# Altium PCB DigitalClocks.PcbDoc
Units mm, origin at the board's own origin, x right, y up, seen from the top; angles counter-clockwise.
Board outline 140 x 100 mm, 2 copper layers (Top Layer, Bottom Layer); 30 components, 81 nets, 289 pads, 15 vias.
Unrouted connection lines stored in the file: 31.
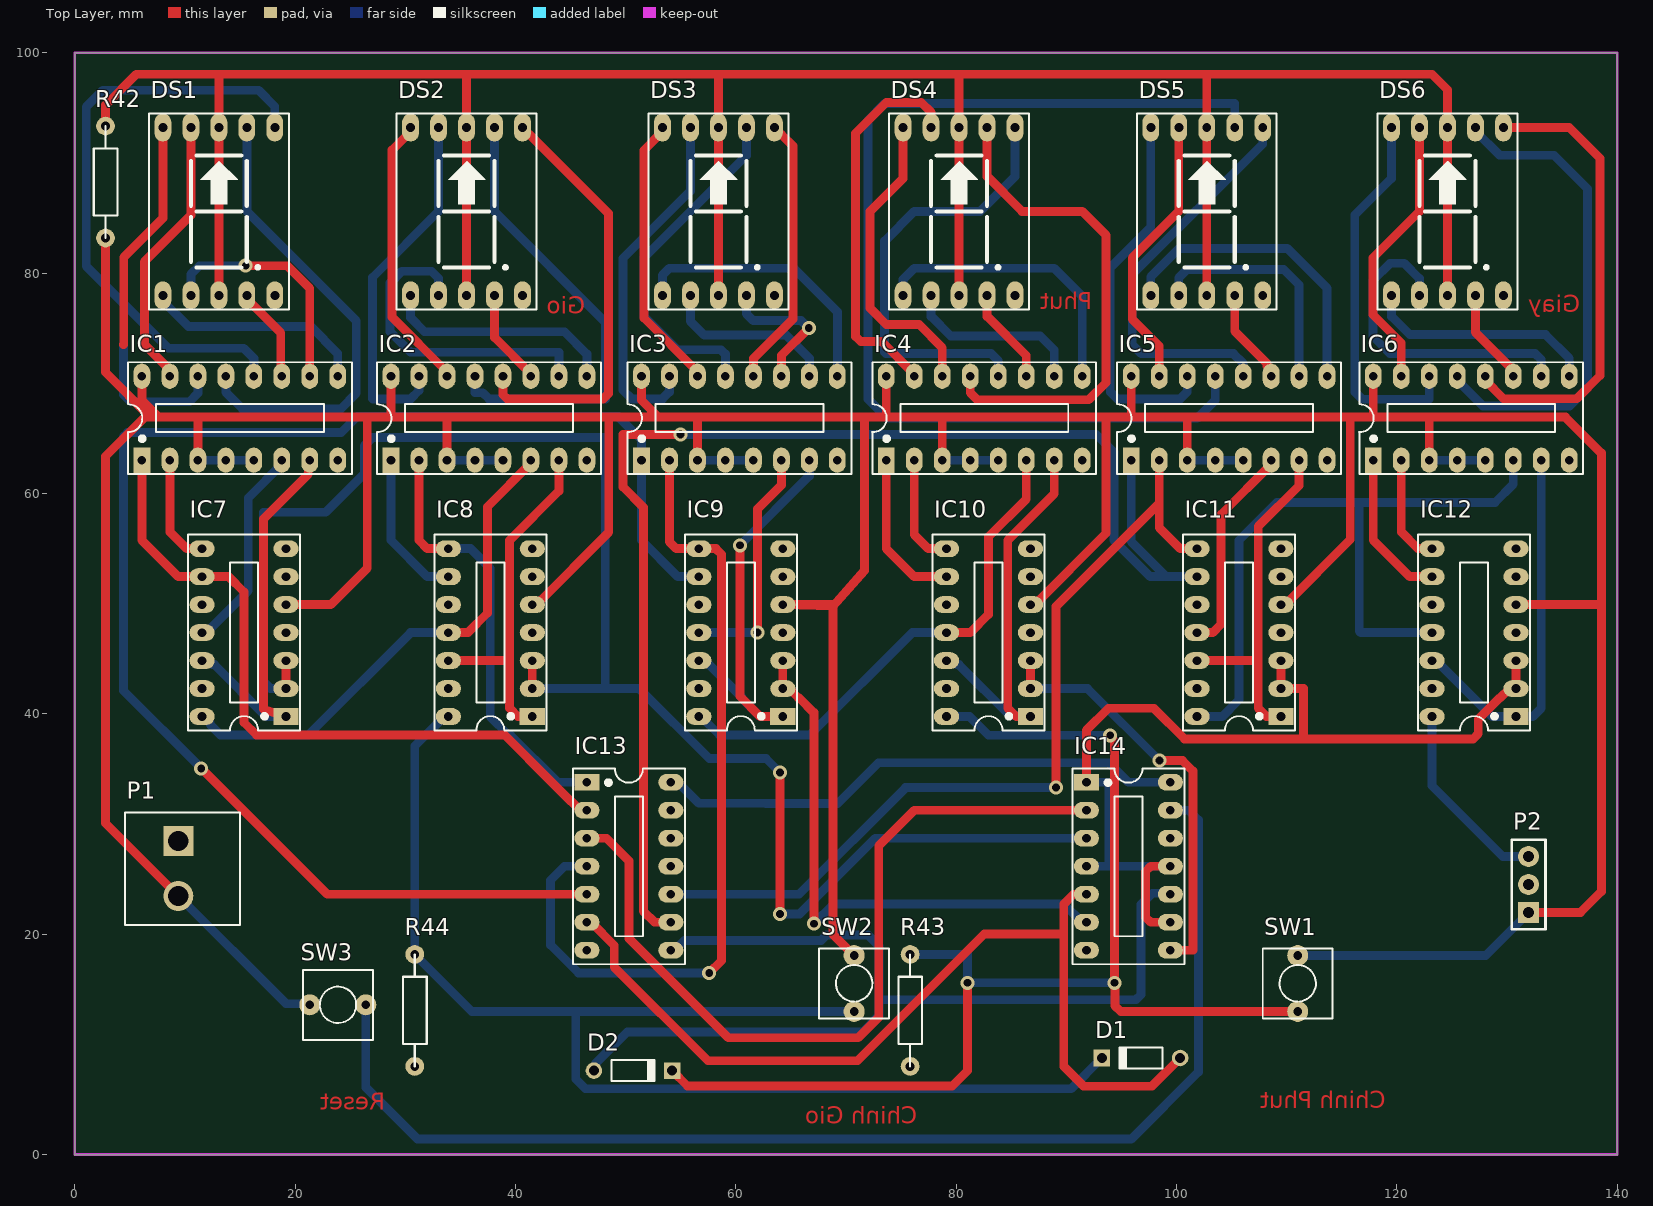
[diagram p0: Top Layer view]
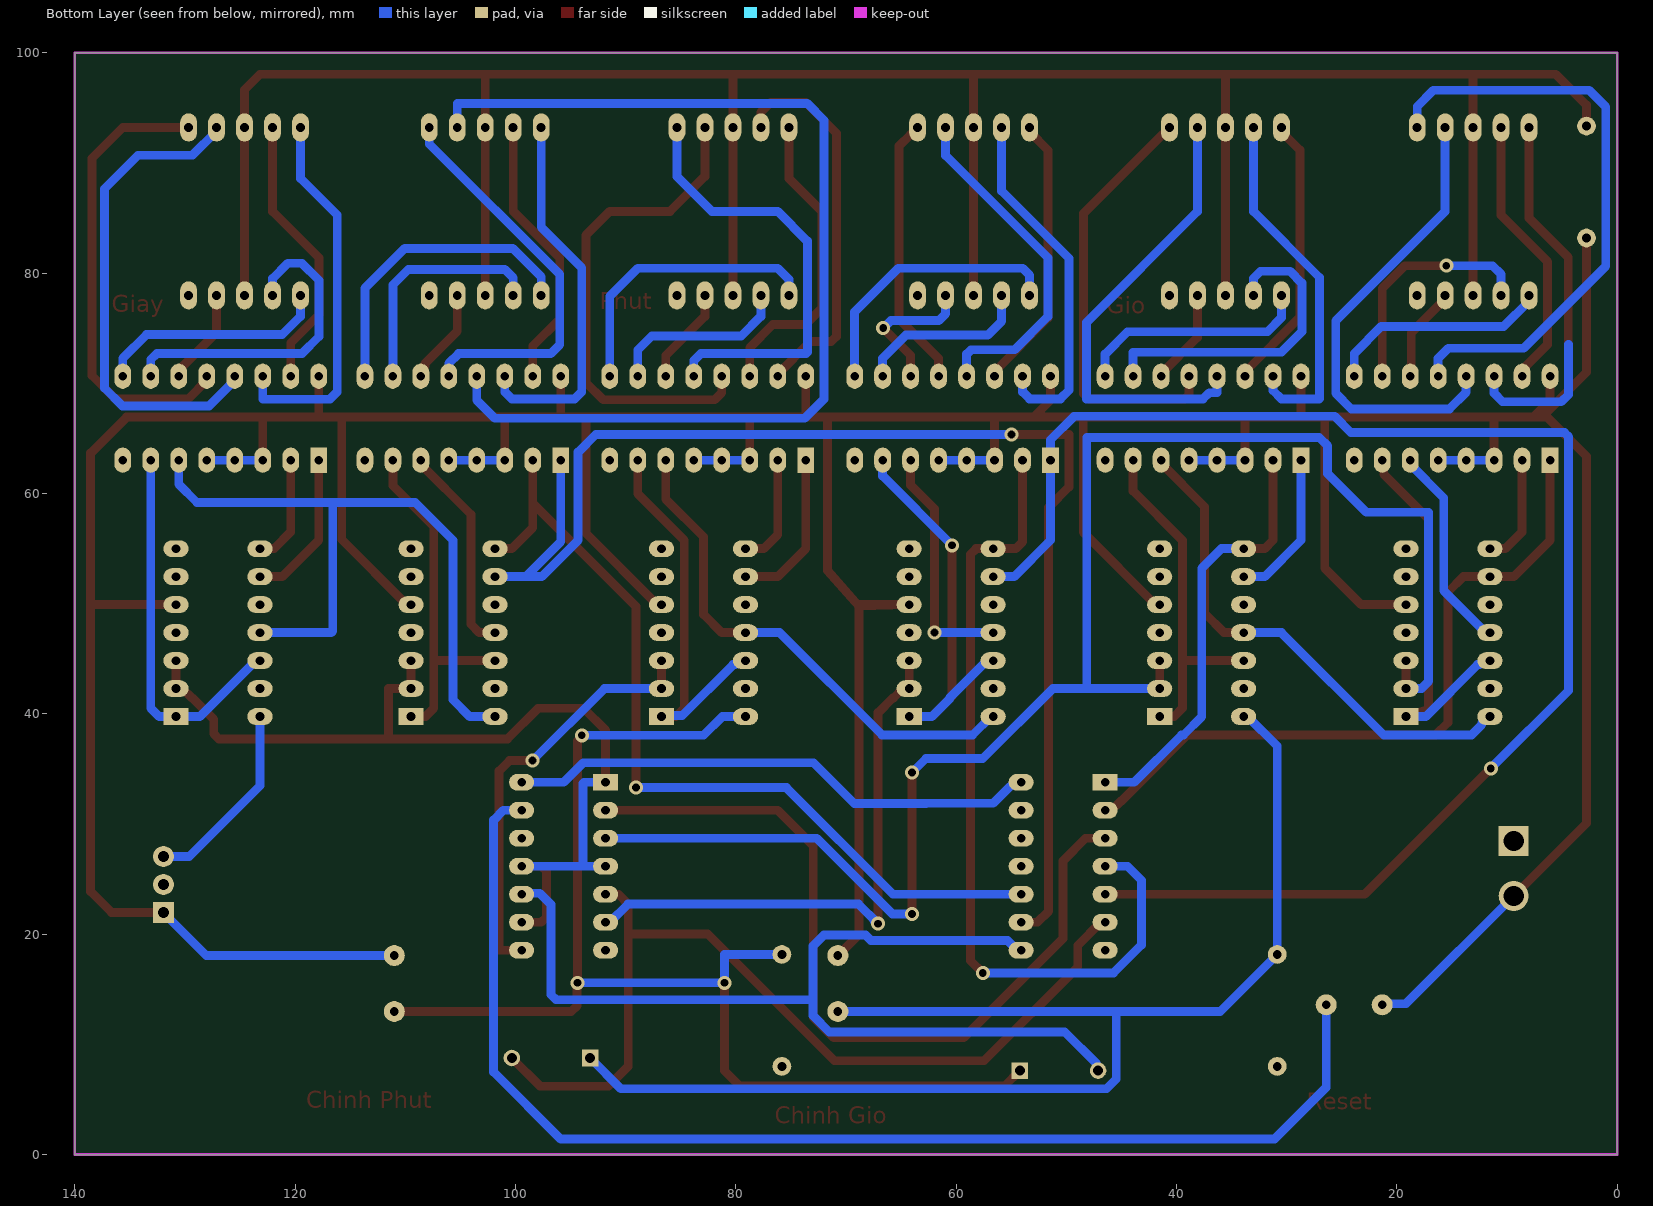
[diagram p1: Bottom Layer view, seen from below]
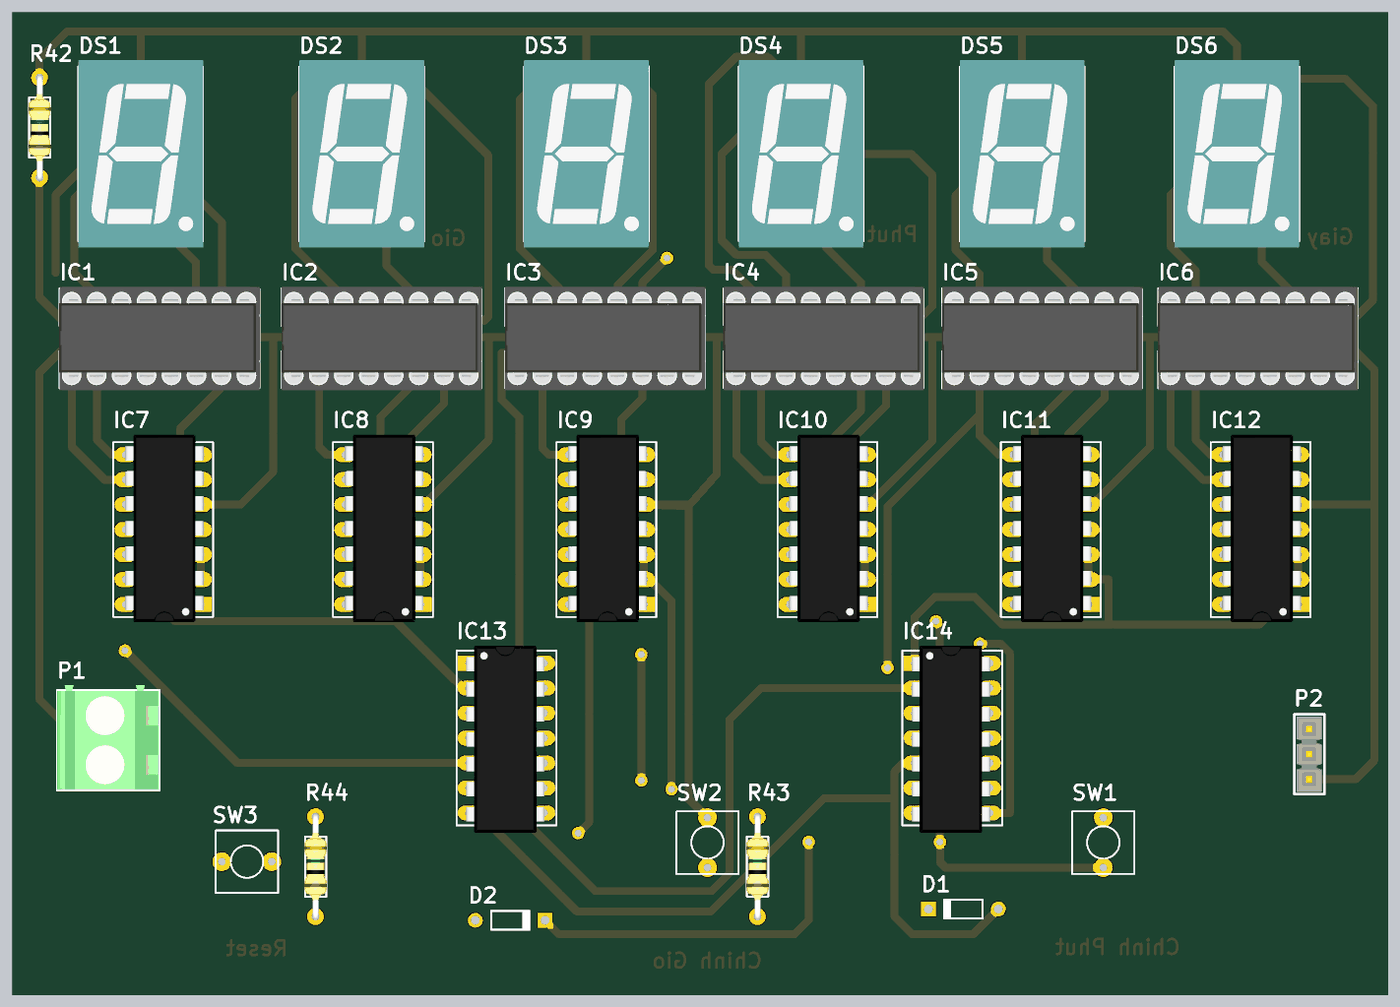
[diagram p2: 3D render of the assembled board from above, using the file's embedded part models]

## Layer stack, top to bottom
Top Solder: solder mask 0.0102, Solder Resist, Dk 3.5
Top Layer: signal copper 0.0356
Dielectric 1: dielectric 0.32, FR-4, Dk 4.8
Bottom Layer: signal copper 0.0356
Bottom Solder: solder mask 0.0102, Solder Resist, Dk 3.5

## Board outline
0,0 0,100 140,100 140,0

## Design rules (kind name [scope] priority, off if disabled: settings)
Clearance [All] p1: gap=0.5 ignorepadtopadclearanceinfootprint=FALSE
PolygonConnect [All] p1: connectstyle=Relief reliefconductorwidth=0.254 reliefentries=4 polygonreliefangle="90 Angle" airgapwidth=0.254
RoutingVias [All] p1: holewidth=0.711 width=1.27 viastyle="Through Hole" minholewidth=0.711 minwidth=1.27 maxholewidth=0.711 maxwidth=1.27
SolderMaskExpansion [All] p1: expansion=0.102 istentingtop=FALSE
Width [All] p1: maxlimit=0.8 minlimit=0.6 preferedwidth=0.8
30 further rules are at their usual default settings.

## Components (designator, comment, footprint, x,y, rotation, side; value= is the part's Value field where it differs from the comment)
D1 "Diode 1N4148" DO-35 96.774,8.763 r180 top
D2 "Diode 1N4148" DO-35 50.673,7.62 r0 top
DS1 "7SEG S" 7SEGS 8.001,77.978 r0 top value="LED 7S SEG"
DS2 "7SEG S" 7SEGS 30.48,77.978 r0 top value="LED 7S SEG"
DS3 "7SEG S" 7SEGS 53.34,77.978 r0 top value="LED 7S SEG"
DS4 "7SEG S" 7SEGS 75.184,77.978 r0 top value="LED 7S SEG"
DS5 "7SEG S" 7SEGS 97.663,77.978 r0 top value="LED 7S SEG"
DS6 "7SEG S" 7SEGS 119.507,77.978 r0 top value="LED 7S SEG"
IC1 "7447" DIP16/W0.3 6.096,63.019 r0 top value="7447 , 74247"
IC2 "7447" DIP16/W0.3 28.702,63.019 r0 top value="7447 , 74247"
IC3 "7447" DIP16/W0.3 51.435,63.019 r0 top value="7447 , 74247"
IC4 "7447" DIP16/W0.3 73.66,63.019 r0 top value="7447 , 74247"
IC5 "7447" DIP16/W0.3 95.885,63.019 r0 top value="7447 , 74247"
IC6 "7447" DIP16/W0.3 117.856,63.019 r0 top value="7447 , 74247"
IC7 "7490" DIP14/W0.3 19.177,39.751 r90 top
IC8 "7490" DIP14/W0.3 41.529,39.751 r90 top
IC9 "7490" DIP14/W0.3 64.262,39.751 r90 top
IC10 "7490" DIP14/W0.3 86.741,39.751 r90 top
IC11 "7490" DIP14/W0.3 109.474,39.751 r90 top
IC12 "7490" DIP14/W0.3 130.81,39.751 r90 top
IC13 "7408" DIP14/W0.3 46.482,33.782 r270 top
IC14 "7432" DIP14/W0.3 91.821,33.782 r270 top
P1 "Header 2" "TBlock 2" 9.398,28.448 r270 top
P2 "Header 3" "Header 3" 131.953,21.971 r90 top
R42 "RESISTOR" "Res 10mm (1/2W)" 2.794,88.265 r90 top value=470
R43 "RESISTOR" "Res 10mm (1/2W)" 75.819,13.081 r90 top value=330
R44 "RESISTOR" "Res 10mm (1/2W)" 30.861,13.081 r90 top value=330
SW1 "SW" SW2 110.998,18.059 r270 top value="SW chip 2 pin"
SW2 "SW" SW2 70.739,18.059 r270 top value="SW chip 2 pin"
SW3 "SW" SW2 26.416,13.589 r180 top value="SW chip 2 pin"

## Footprints (in the part's own frame and the unit in brackets; to place one, negate y for a bottom-side part, rotate by r counter-clockwise, add the part's x,y. Pads: shape width x height; smd on the part's side, far side on the other; paste and mask are expansions set on the pad)
7SEGS [mil] "DIP 10 Leads; Body 12 x 15 mm; Pitch 0.5 mm"
  oval 60x100 hole 32: 1(0,0) 2(100,0) 3(200,0) 4(300,0) 5(400,0) 6(400,600) 7(300,600) 8(200,600) 9(100,600) 10(0,600)
  silkscreen extent -50,-50 450,650, body extent -50,-75 450,675, height 316
DIP14/W0.3 [mil] "14PINs, W=300mil, Pitch=100mil"
  rect 60x90 hole 31: 1(0,0)
  oval 60x90 hole 31: 2(100,0) 3(200,0) 4(300,0) 5(400,0) 6(500,0) 7(600,0) 8(600,300) 9(500,300) 10(400,300) 11(300,300) 12(200,300) 13(100,300) 14(0,300)
  silkscreen extent -50,-50 650,350, body extent -70,-12 680,302, height 145
DIP16/W0.3 [mil] "16 PIN, W=300mil, Pitch=100mil"
  rect 60x90 hole 31: 1(0,0)
  oval 60x90 hole 31: 2(100,0) 3(200,0) 4(300,0) 5(400,0) 6(500,0) 7(600,0) 8(700,0) 9(700,300) 10(600,300) 11(500,300) 12(400,300) 13(300,300) 14(200,300) 15(100,300) 16(0,300)
  silkscreen extent -50,-50 750,350, body extent -52,-57 752,356, height 299
DO-35 [mm] "Diode, Axial; Body 3.8 x 1.9 mm (LxDia. max), Lead Dia. 0.53 mm (max)"
  round 1.5 hole 0.9: 1(-3.55,0)
  rect 1.5x1.5 hole 0.9: 2(3.55,0)
  silkscreen extent -1.95,-0.95 2.05,0.95
"Header 3" [mil] "Connector; Header; 3 Position; Solder Pad 35mil"
  rect 75x75 hole 40: 1(0,0)
  round 75 hole 40: 2(100,0) 3(200,0)
  silkscreen extent -60,-60 260,60, body extent -50,-50 250,50, height 83
"Res 10mm (1/2W)" [mil] "Resistor; 2 Leads; 1/2W; Solder Pad 35mil"
  round 67 hole 32: 1(-200,0) 2(200,0)
  silkscreen extent -200,-43 200,42, body extent -212,-46 212,45, height 96
SW2 [mil] "SW button 2pin, 250x 250 mil"
  round 75 hole 31: 1(0,0) 2(200,0)
  silkscreen extent -25,-125 225,125
"TBlock 2" [mil] "Connector; Terminal; 2 Positions; Solder Pad 35mil"
  rect 107x107 hole 72: 1(0,0)
  round 107 hole 72: 2(196,0)
  silkscreen extent -102,-190 300,220, body extent -122,-189 296,217, height 560

## Part data
D1 D2: "High Conductance Fast Diode", Code_JEDEC=DO-204-AH, ComponentLink1Description="Manufacturer Link", ComponentLink1URL=http://www.fairchildsemi.com/, ComponentLink2Description=Datasheet, ComponentLink2URL=http://www.fairchildsemi.com/ds/1N%2F1N4148.pdf, DatasheetVersion=1997, LatestRevisionDate=17-Jul-2002, LatestRevisionNote="Re-released for DXP Platform.", PackageDescription="Diode, Axial; Body 3.8 x 1.9 mm (LxDia. max), Lead Dia. 0.53 mm (max)", PackageReference=DO-35, Published=8-Jun-2000, Publisher="Altium Limited"
DS1 DS2 DS3 DS4 DS5 DS6: library part LED7S, "Single 7 Seg Dipslay"
IC1 IC2 IC3 IC4 IC5 IC6: "BCD to 7-Segment Decoder/Driver"
IC7 IC8 IC9 IC10 IC11 IC12: "4-Bit Decade Counter"
IC13: "Quad 2-Input AND Gate"
IC14: "Quad 2-Input OR Gate"
P1: "Header, 2-Pin", LatestRevisionDate=17-Jul-2002, LatestRevisionNote="Re-released for DXP Platform.", Publisher="Altium Limited"
P2: "Header, 3-Pin", LatestRevisionDate=17-Jul-2002, LatestRevisionNote="Re-released for DXP Platform.", Publisher="Altium Limited"
R42 R43 R44: "Resistor", LatestRevisionDate=17-Jul-2002, LatestRevisionNote="Re-released for DXP Platform.", PackageReference=AXIAL-0.3, Published=8-Jun-2000, Publisher="Altium Limited"
SW1 SW2 SW3: library part SW2, "Switch button 2 pin"

## Via types
v1: diameter 1.27, hole 0.711, Top Layer to Bottom Layer, 15 vias

## Nets (pads, with @x,y where several pads share a name; then routed paths per layer and width w, separated by ;. In a path a pad name is that pad's centre, name@x,y a point inside that pad or via, vN(x,y) a via of type N, cw(c..) or ccw(c..) an arc to the next point about the centre after c; other vN are vias at no path point)
1-8B: IC2.2 IC8.8 IC13.1 | length 39.5
  Top Layer w0.8: IC2.2 31.242,55.753 32.004,54.991 IC8.8
  Bottom Layer w0.8: IC8.8 35.941,54.991 37.719,53.213 37.719,39.726 39.37,38.075 39.541,38.075 43.833,33.782 IC13.1
1-12A: IC1.7 IC7.1 IC7.12 | length 36.2
  Top Layer w0.8: IC7.1 17.12,40.411 17.12,57.671 21.197,61.749 21.197,62.88 IC1.7
  Bottom Layer w0.8: IC7.12 12.134,44.831 12.496,44.469 12.681,44.469 17.399,39.751 IC7.1
1-12B: IC2.7 IC8.1 IC8.12 | length 32.3
  Top Layer w0.8: IC8.12 39.472,44.831 ; IC8.1 40.234,39.751 39.472,40.513 39.472,44.831 ; IC2.7 43.942,60.223 39.472,55.753 39.472,44.831
1-12C: IC3.7 IC9.1 IC9.12 | length 38.4
  Top Layer w0.8: v1(60.376,55.296) 60.376,41.605 62.23,39.751 IC9.1
  Bottom Layer w0.8: IC9.12 57.219,44.831 57.581,44.469 57.594,44.469 60.554,41.509 60.554,41.427 62.23,39.751 IC9.1 ; v1(60.376,55.296) 66.675,61.595 IC3.7
1-12D: IC4.7 IC10.1 IC10.12 | length 36.3
  Top Layer w0.8: IC10.1 85.446,39.751 84.684,40.513 84.684,55.753 88.9,59.969 IC4.7
  Bottom Layer w0.8: IC10.12 79.698,44.831 80.06,44.469 80.245,44.469 84.867,39.847 86.645,39.847 IC10.1
1-12E: IC5.7 IC11.1 IC11.12 | length 32
  Top Layer w0.8: IC11.12 107.417,44.831 ; IC11.1 108.179,39.751 107.417,40.513 107.417,44.831 ; IC5.7 111.125,60.721 107.417,57.013 107.417,44.831
1-12F: IC6.7 IC12.1 IC12.12 | length 34.8
  Bottom Layer w0.8: IC12.12 123.571,44.831 128.651,39.751 IC12.1 132.334,39.751 133.096,40.513 IC6.7
2-9A: IC1.1 IC7.9 IC13.2 | length 64.7
  Top Layer w0.8: IC1.1 6.096,55.753 9.398,52.451 IC7.9 13.97,52.451 15.367,51.054 15.367,39.218 16.51,38.075 39.014,38.075 43.307,33.782 43.307,33.779 45.005,32.082 45.066,32.082 45.905,31.242 IC13.2
8C-4: IC3.2 IC9.8 IC13.4 | length 76.2
  Top Layer w0.8: IC3.2 53.975,55.626 54.61,54.991 IC9.8 58.191,54.991 58.699,54.483 58.699,17.602 v1(57.582,16.485)
  Bottom Layer w0.8: IC13.4 44.45,26.162 43.18,24.892 43.18,19.025 45.72,16.485 v1(57.582,16.485)
8E-10: IC5.2 IC11.8 IC13.10 | length 79
  Top Layer w0.8: v1(89.052,33.299) 89.052,49.733 98.425,59.106 ; IC5.2 98.425,59.106 ; IC11.8 100.33,54.991 98.425,56.896 98.425,59.106
  Bottom Layer w0.8: IC13.10 65.735,23.622 75.413,33.299 v1(89.052,33.299)
9C-5: IC3.1 IC9.9 IC13.5 | length 137.1
  Top Layer w0.8: v1(11.481,35.052) 22.911,23.622 IC13.5
  Bottom Layer w0.8: v1(11.481,35.052) 4.42,42.113 4.42,65.151 4.801,65.532 24.181,65.532 25.654,67.005 49.294,67.005 51.435,64.864 IC3.1 51.435,55.753 54.737,52.451 IC9.9
9E-9: IC5.1 IC11.9 IC13.9 | length 120.9
  Top Layer w0.8: IC13.9 52.629,21.082 51.613,22.098 51.613,58.75 49.773,60.59 49.773,65.354 v1(54.966,65.354)
  Bottom Layer w0.8: v1(54.966,65.354) 92.71,65.354 94.31,63.754 94.31,55.753 97.612,52.451 99.06,52.451 ; IC5.1 95.885,55.626 99.06,52.451 ; IC11.9 99.06,52.451
14A-11B: IC2.6 IC7.14 IC8.11 | length 46.8
  Top Layer w0.8: IC8.11 35.687,47.371 37.465,49.149 37.465,58.801 41.402,62.738 IC2.6
  Bottom Layer w0.8: IC7.14 11.742,39.751 12.3,39.193 12.3,39.008 13.221,38.087 15.354,38.087 15.367,38.075 21.184,38.075 30.48,47.371 IC8.11
14C-11D: IC4.6 IC9.14 IC10.11 | length 46.9
  Top Layer w0.8: IC10.11 81.28,47.371 82.931,49.022 82.931,56.058 86.36,59.487 IC4.6
  Bottom Layer w0.8: IC9.14 56.839,39.751 58.515,38.075 66.726,38.075 76.022,47.371 IC10.11
14E-11F: IC6.6 IC11.14 IC12.11 | length 66.5
  Bottom Layer w0.8: IC11.14 104.14,39.751 105.664,41.275 105.664,55.753 109.093,59.182 116.713,59.182 ; IC12.11 116.713,47.371 116.586,47.498 116.586,59.055 116.713,59.182 ; IC6.6 130.556,60.833 128.905,59.182 116.713,59.182
23A-23B: IC7.2 IC7.3 IC8.2 IC8.3 IC14.3 | length 150
  Top Layer w0.8: IC7.2 IC7.3 ; IC8.2 IC8.3 ; v1(64.008,21.844) v1(64.008,34.671)
  Bottom Layer w0.8: IC7.2 17.78,42.291 17.12,42.951 17.12,58.293 22.784,58.293 26.289,61.798 26.289,64.313 27.051,65.075 48.144,65.075 48.144,42.291 ; IC8.2 48.144,42.291 ; v1(64.008,21.844) 65.806,21.844 72.664,28.702 IC14.3 ; v1(64.008,34.671) 62.738,35.941 57.582,35.941 51.232,42.291 48.144,42.291
23C-6: IC9.2 IC9.3 IC14.6 | length 52.1
  Top Layer w0.8: IC9.3 IC9.2 64.839,42.291 65.693,41.437 65.754,41.437 67.084,40.107 v1(67.084,20.951)
  Bottom Layer w0.8: v1@67.472,21.212 67.211,20.951 v1(67.084,20.951) 68.866,22.733 89.789,22.733 91.44,21.082 IC14.6
23D-8: IC10.2 IC10.3 IC14.8 | length 38.7
  Top Layer w0.8: IC10.2 IC10.3 ; v1(98.45,35.763) 100.533,35.763 101.498,34.798 101.498,18.542 IC14.8
  Bottom Layer w0.8: IC10.2 91.923,42.291 v1(98.45,35.763)
+5: IC1.3 IC1.4 IC1.5 IC1.16 IC2.3 IC2.4 IC2.5 IC2.16 IC3.3 IC3.4 IC3.5 IC3.16 IC4.3 IC4.4 IC4.5 IC4.16 IC5.3 IC5.4 IC5.5 IC5.16 IC6.3 IC6.4 IC6.5 IC6.16 IC7.5 IC8.5 IC9.5 IC10.5 IC11.5 IC12.5 P1.2 P2.1 R42.1 SW1.1 SW2.1 SW3.2 | length 512.6
  Top Layer w0.8: R42.1 2.794,70.993 6.858,66.929 ; IC1.16 6.096,68.453 7.62,66.929 ; P1.2 2.794,30.074 2.794,63.373 6.35,66.929 6.858,66.929 ; IC1.3 11.176,66.929 ; IC7.5 23.241,49.911 26.543,53.213 26.543,66.929 ; IC2.16 28.702,66.929 ; IC2.3 33.782,66.929 ; IC8.5 41.91,49.911 48.473,56.474 48.473,66.888 48.514,66.929 ; IC3.16 51.435,68.453 52.959,66.929 ; IC3.3 56.515,66.929 ; SW2.1 68.809,19.99 68.809,49.759 ; 73.66,67.051 IC4.16 ; IC4.3 78.74,66.929 ; IC10.5 87.122,49.911 93.599,56.388 93.599,66.929 ; IC5.16 95.885,66.929 ; IC5.3 100.965,66.929 ; IC11.5 109.855,49.911 115.765,55.821 115.765,66.87 115.824,66.929 ; IC6.16 117.856,67.056 117.729,66.929 ; IC6.3 122.936,66.802 123.063,66.929 ; IC12.5 138.557,49.911 ; P2.1 136.652,21.971 138.557,23.876 138.557,49.911 ; 6.858,66.929 7.62,66.929 ; 7.62,66.929 11.176,66.929 ; 11.176,66.929 26.543,66.929 ; 26.543,66.929 28.702,66.929 ; 28.702,66.929 33.782,66.929 ; 33.782,66.929 48.514,66.929 ; 48.514,66.929 52.959,66.929 ; 52.959,66.929 56.515,66.929 ; 56.515,66.929 71.755,66.929 ; 68.809,49.759 68.656,49.911 IC9.5 68.809,49.759 ; 68.809,49.759 71.679,53.01 71.679,66.853 71.755,66.929 ; 71.755,66.929 78.74,66.929 ; 78.74,66.929 93.599,66.929 ; 93.599,66.929 95.885,66.929 ; 95.885,66.929 100.965,66.929 ; 100.965,66.929 115.824,66.929 ; 115.824,66.929 117.729,66.929 ; 117.729,66.929 123.063,66.929 ; 123.063,66.929 135.294,66.929 138.557,63.666 138.557,49.911
  Bottom Layer w0.8: P1.2 19.183,13.684 21.241,13.684 SW3.2 ; IC1.3 IC1.4 IC1.5 ; IC2.3 IC2.4 IC2.5 ; IC3.3 IC3.4 IC3.5 ; IC4.3 IC4.4 IC4.5 ; IC5.3 IC5.4 IC5.5 ; SW1.1 128.041,18.059 P2.1 ; IC6.3 IC6.4 IC6.5
GND: IC1.8 IC2.8 IC3.8 IC4.8 IC5.8 IC6.8 IC7.6 IC7.7 IC7.10 IC8.6 IC8.7 IC8.10 IC9.6 IC9.7 IC9.10 IC10.6 IC10.7 IC10.10 IC11.6 IC11.7 IC11.10 IC12.6 IC12.7 IC12.10 IC13.7 IC14.7 IC14.12 P1.1 P2.2 R43.1 R44.1
NetD1_1: D1.1 IC13.6 IC14.5 | length 84
  Top Layer w0.8: IC13.6 46.863,21.082 48.971,18.974 48.971,17.013 57.475,8.509 71.044,8.509 82.55,20.015 89.713,20.015 89.764,20.066 ; IC14.5 90.653,23.622 89.764,22.733 89.764,20.066 ; D1.1 97.759,6.198 91.567,6.198 89.764,8.001 89.764,20.066
NetD1_2: D1.2 IC8.14 R44.2 SW2.2 | length 120.5
  Bottom Layer w0.8: IC8.14 33.528,39.751 30.861,37.084 R44.2 36.043,12.979 45.491,12.979 ; SW2.2 45.491,12.979 ; D1.2 90.431,5.97 46.355,5.97 45.473,6.852 45.473,12.961 45.491,12.979
NetD2_1: D2.1 IC13.8 IC14.10 | length 89.7
  Bottom Layer w0.8: D2.1 47.257,7.754 47.257,8.24 50.144,11.127 71.506,11.127 72.981,12.602 72.981,14.054 ; IC13.8 54.44,18.542 55.314,19.416 67.719,19.416 68.216,19.912 72.016,19.912 72.981,18.947 72.981,14.054 ; IC14.10 99.345,23.718 97.79,23.718 96.781,22.709 96.781,14.523 96.312,14.054 72.981,14.054
NetD2_2: D2.2 IC10.14 R43.2 SW1.2 | length 114.1
  Top Layer w0.8: D2.2 55.62,6.223 79.629,6.223 81.026,7.62 v1(81.026,15.589) ; v1(93.98,38.049) 93.98,37.922 94.377,37.525 v1(94.377,15.589) 94.377,15.351 94.408,15.32 94.408,13.516 94.945,12.979 SW1.2
  Bottom Layer w0.8: R43.2 81.026,18.161 v1(81.026,15.589) v1(94.377,15.589) ; IC10.14 81.229,39.751 82.931,38.049 v1(93.98,38.049)
NetDS1_1: DS1.1 IC1.9 | length 20.4
  Bottom Layer w0.8: DS1.1 8.001,77.47 10.312,75.159 21.412,75.159 23.876,72.695 IC1.9
NetDS1_2: DS1.2 IC1.10 | length 21.9
  Top Layer w0.8: v1(15.519,80.67) 19.279,80.67 21.336,78.613 IC1.10
  Bottom Layer w0.8: DS1.2 10.541,79.883 11.328,80.67 v1(15.519,80.67)
NetDS1_3: DS1.3 DS1.8 DS2.3 DS2.8 DS3.3 DS3.8 DS4.3 DS4.8 DS5.3 DS5.8 DS6.3 DS6.8 R42.2 | length 244.5
  Top Layer w0.8: R42.2 2.794,95.25 5.588,98.044 13.081,98.044 ; DS1.3 DS1.8 13.081,98.044 ; DS2.3 DS2.8 35.56,97.917 35.433,98.044 ; DS3.3 DS3.8 58.42,98.044 ; DS4.3 DS4.8 80.264,98.044 ; DS5.3 DS5.8 102.743,98.044 ; DS6.3 DS6.8 124.587,96.647 123.19,98.044 102.743,98.044 ; 13.081,98.044 35.433,98.044 ; 35.433,98.044 58.42,98.044 ; 58.42,98.044 80.264,98.044 ; 80.264,98.044 102.743,98.044
NetDS1_4: DS1.4 IC1.11 | length 8.7
  Top Layer w0.8: DS1.4 15.621,77.66 18.703,74.577 18.703,70.731 IC1.11
NetDS1_6: DS1.6 IC1.12 | length 55
  Bottom Layer w0.8: IC1.12 16.256,72.263 15.342,73.177 8.484,73.177 1.041,80.62 1.041,95.098 2.54,96.596 16.688,96.596 18.161,95.123 DS1.6
NetDS1_7: DS1.7 IC1.13 | length 42.7
  Bottom Layer w0.8: IC1.13 13.716,69.19 15.24,67.666 24.13,67.666 25.552,69.088 25.552,75.667 15.621,85.598 DS1.7
NetDS1_9: DS1.9 IC1.15 | length 25.3
  Top Layer w0.8: IC1.15 8.636,71.216 6.325,73.527 6.325,81.026 10.541,85.242 DS1.9
NetDS1_10: DS1.10 IC1.14 | length 34.6
  Top Layer w0.8: 4.42,73.508 4.445,73.533 4.445,81.432 8.001,84.988 DS1.10
  Bottom Layer w0.8: 4.42,73.508 4.42,68.986 5.08,68.326 10.414,68.326 11.176,69.088 IC1.14
NetDS2_1: DS2.1 IC2.9 | length 21.4
  Bottom Layer w0.8: DS2.1 30.48,75.946 31.75,74.676 44.45,74.676 46.482,72.644 IC2.9
NetDS2_2: DS2.2 IC2.10 | length 29.3
  Bottom Layer w0.8: DS2.2 33.02,79.527 32.385,80.162 29.693,80.162 28.626,79.096 28.626,74.676 30.48,72.822 43.917,72.822 43.942,72.796 IC2.10
NetDS2_4: DS2.4 IC2.11 | length 8.7
  Top Layer w0.8: DS2.4 38.1,74.168 41.402,70.866 IC2.11
NetDS2_6: DS2.6 IC2.12 | length 39.2
  Top Layer w0.8: IC2.12 38.862,68.986 39.268,68.58 47.969,68.58 48.437,69.049 48.437,85.421 41.287,92.571 40.974,92.571 40.64,92.906 DS2.6
NetDS2_7: DS2.7 IC2.13 | length 42.4
  Bottom Layer w0.8: IC2.13 36.322,69.147 37.029,69.147 37.597,68.58 48.158,68.58 48.158,75.54 38.1,85.598 DS2.7
NetDS2_9: DS2.9 IC2.15 | length 32.9
  Bottom Layer w0.8: IC2.15 31.242,69.342 30.48,68.58 27.051,68.58 27.026,68.605 27.026,79.604 33.02,85.598 DS2.9
NetDS2_10: DS2.10 IC2.14 | length 25.3
  Top Layer w0.8: DS2.10 30.48,92.847 28.804,91.171 28.804,75.997 33.782,71.018 IC2.14
NetDS3_1: DS3.1 IC3.9 | length 25.4
  Bottom Layer w0.8: DS3.1 53.34,79.807 53.975,80.442 65.253,80.442 69.215,76.479 IC3.9
NetDS3_2: DS3.2 IC3.10 | length 16.2
  Bottom Layer w0.8: DS3.2 55.88,75.641 57.15,74.371 64.567,74.371 66.675,72.263 IC3.10
NetDS3_4: DS3.4 IC3.11 | length 13.3
  Top Layer w0.8: IC3.11 64.135,72.517 v1(66.624,75.006)
  Bottom Layer w0.8: DS3.4 60.96,76.327 61.595,75.692 65.938,75.692 v1(66.624,75.006)
NetDS3_6: DS3.6 IC3.12 | length 24.9
  Top Layer w0.8: IC3.12 61.595,72.238 65.176,75.819 65.176,91.542 64.147,92.571 63.834,92.571 63.5,92.906 DS3.6
NetDS3_7: DS3.7 IC3.13 | length 31.8
  Bottom Layer w0.8: IC3.13 59.055,72.644 58.649,73.05 54.686,73.05 51.664,76.073 51.664,81.382 60.96,90.678 DS3.7
NetDS3_9: DS3.9 IC3.15 | length 32.6
  Bottom Layer w0.8: IC3.15 53.975,69.215 53.34,68.58 50.546,68.58 49.759,69.367 49.759,81.331 55.88,87.452 DS3.9
NetDS3_10: DS3.10 IC3.14 | length 25.3
  Top Layer w0.8: DS3.10 53.34,92.822 51.664,91.145 51.664,75.921 56.515,71.069 IC3.14
NetDS4_1: DS4.1 IC4.9 | length 26.4
  Bottom Layer w0.8: DS4.1 75.184,79.426 76.2,80.442 88.9,80.442 91.44,77.902 IC4.9
NetDS4_2: DS4.2 IC4.10 | length 16.7
  Bottom Layer w0.8: DS4.2 77.724,76.073 79.502,74.295 87.63,74.295 88.9,73.025 IC4.10
NetDS4_4: DS4.4 IC4.11 | length 8.8
  Top Layer w0.8: DS4.4 82.804,76.073 86.36,72.517 IC4.11
NetDS4_6: DS4.6 IC4.12 | length 40.8
  Bottom Layer w0.8: IC4.12 83.82,72.06 83.185,72.695 73.635,72.695 73.508,72.822 73.508,82.906 76.2,85.598 82.169,85.598 85.344,88.773 DS4.6
NetDS4_7: DS4.7 IC4.13 | length 45.6
  Top Layer w0.8: IC4.13 81.28,69.139 81.915,68.504 92.036,68.504 93.608,70.076 93.608,83.43 91.44,85.598 85.979,85.598 82.804,88.773 DS4.7
NetDS4_9: DS4.9 IC4.15 | length 35.1
  Top Layer w0.8: IC4.15 76.2,70.83 73.243,73.787 71.335,73.787 70.866,74.256 70.866,92.685 73.66,95.479 76.835,95.479 77.724,94.59 DS4.9
NetDS4_10: DS4.10 IC4.14 | length 28.3
  Top Layer w0.8: DS4.10 75.184,88.595 72.187,85.598 72.187,76.81 73.66,75.336 76.632,75.336 78.74,73.228 IC4.14
NetDS5_1: DS5.1 IC5.9 | length 28.2
  Bottom Layer w0.8: DS5.1 97.663,79.654 100.254,82.245 110.033,82.245 113.665,78.613 IC5.9
NetDS5_2: DS5.2 IC5.10 | length 21.7
  Bottom Layer w0.8: DS5.2 100.203,79.578 100.965,80.34 109.703,80.34 111.125,78.918 IC5.10
NetDS5_4: DS5.4 IC5.11 | length 8.7
  Top Layer w0.8: DS5.4 105.283,74.714 108.223,71.774 108.223,71.578 108.585,71.216 IC5.11
NetDS5_6: DS5.6 IC5.12 | length 36.5
  Bottom Layer w0.8: IC5.12 106.045,71.806 105.156,72.695 96.799,72.695 95.987,73.508 95.987,79.883 107.823,91.719 DS5.6
NetDS5_7: DS5.7 IC5.13 | length 96.5
  Bottom Layer w0.8: IC5.13 103.505,68.453 101.879,66.827 73.736,66.827 71.984,68.58 71.984,93.853 73.533,95.402 105.283,95.402 DS5.7
NetDS5_9: DS5.9 IC5.15 | length 25.3
  Top Layer w0.8: IC5.15 98.425,73.381 95.987,75.819 95.987,81.382 100.203,85.598 DS5.9
NetDS5_10: DS5.10 IC5.14 | length 34.5
  Bottom Layer w0.8: DS5.10 97.663,84.176 93.98,80.493 93.98,69.215 94.615,68.58 100.33,68.58 100.965,69.215 IC5.14
NetDS6_1: DS6.1 IC6.9 | length 21.2
  Bottom Layer w0.8: DS6.1 119.507,76.073 121.158,74.422 133.477,74.422 135.636,72.263 IC6.9
NetDS6_2: DS6.2 IC6.10 | length 29.7
  Bottom Layer w0.8: DS6.2 122.047,79.502 120.65,80.899 119.38,80.899 117.831,79.35 117.831,74.244 119.38,72.695 132.563,72.695 133.096,72.161 IC6.10
NetDS6_4: DS6.4 IC6.11 | length 8.8
  Top Layer w0.8: DS6.4 127.127,74.628 130.556,71.199 IC6.11
NetDS6_6: DS6.6 IC6.12 | length 42
  Top Layer w0.8: IC6.12 128.016,70.258 129.678,68.596 136.324,68.596 138.43,70.701 138.43,90.424 135.636,93.218 DS6.6
NetDS6_7: DS6.7 IC6.13 | length 44.6
  Bottom Layer w0.8: IC6.13 125.476,70.258 127.789,67.945 135.674,67.945 137.298,69.569 137.298,87.658 134.253,90.703 129.323,90.703 127.127,92.9 DS6.7
NetDS6_9: DS6.9 IC6.15 | length 25.4
  Top Layer w0.8: IC6.15 120.396,73.66 117.831,76.225 117.831,81.382 122.047,85.598 DS6.9
NetDS6_10: DS6.10 IC6.14 | length 34.5
  Bottom Layer w0.8: DS6.10 119.507,88.595 116.18,85.268 116.18,69.215 116.84,68.555 122.936,68.555 IC6.14
NetIC1_2: IC1.2 IC7.8 | length 10.1
  Top Layer w0.8: IC1.2 8.636,56.515 10.16,54.991 IC7.8
NetIC1_6: IC1.6 IC7.11 | length 18.9
  Bottom Layer w0.8: IC7.11 11.938,47.371 15.748,51.181 15.748,59.59 18.796,62.638 IC1.6
NetIC2_1: IC2.1 IC8.9 | length 13.8
  Bottom Layer w0.8: IC2.1 28.702,55.753 32.004,52.451 IC8.9
NetIC3_6: IC3.6 IC9.11 | length 21.9
  Top Layer w0.8: v1(61.976,47.371) 61.976,58.598 64.135,60.757 IC3.6
  Bottom Layer w0.8: IC9.11 v1(61.976,47.371)
NetIC4_1: IC4.1 IC10.9 | length 14.5
  Top Layer w0.8: IC4.1 73.66,54.991 76.2,52.451 IC10.9
NetIC4_2: IC4.2 IC10.8 | length 10.2
  Top Layer w0.8: IC4.2 76.2,56.261 77.47,54.991 IC10.8
NetIC5_6: IC5.6 IC11.11 | length 19.3
  Top Layer w0.8: IC11.11 103.276,47.371 104.038,48.133 104.038,58.09 108.585,62.636 IC5.6
NetIC6_1: IC6.1 IC12.9 | length 14
  Top Layer w0.8: IC6.1 117.856,55.753 121.158,52.451 IC12.9
NetIC6_2: IC6.2 IC12.8 | length 9.9
  Top Layer w0.8: IC6.2 120.396,56.515 121.92,54.991 IC12.8
NetIC12_14: IC12.14 P2.3 | length 17.7
  Bottom Layer w0.8: IC12.14 123.19,33.477 129.616,27.051 P2.3
NetIC13_3: IC13.3 IC14.2 | length 74.6
  Top Layer w0.8: IC13.3 48.26,28.702 50.292,26.67 50.292,19.621 59.321,10.592 66.091,10.592 71.12,10.592 72.974,12.446 72.974,28.016 76.2,31.242 IC14.2
NetIC14_13: IC14.13 SW3.1 | length 113.3
  Bottom Layer w0.8: SW3.1 26.416,6.096 31.115,1.397 95.885,1.397 101.981,7.493 101.981,30.353 101.092,31.242 IC14.13
RS: IC11.2 IC11.3 IC12.2 IC12.3 IC14.1 IC14.4 IC14.9 IC14.11 | length 86.4
  Top Layer w0.8: IC14.1 91.821,38.506 93.828,40.513 97.942,40.513 100.736,37.719 111.506,37.719 ; IC14.9 97.652,21.082 97.184,21.551 97.184,25.693 97.652,26.162 IC14.11 ; IC11.3 IC11.2 111.531,42.291 111.531,37.744 111.506,37.719 ; IC12.3 IC12.2 130.233,42.291 129.394,41.451 129.333,41.451 127.381,39.5 127.381,38.188 126.912,37.719 111.506,37.719
  Bottom Layer w0.8: IC14.4 93.878,26.162 ; IC14.1 93.777,33.782 93.878,33.68 93.878,26.162 ; IC14.11 93.878,26.162
VCC: IC13.14 IC14.14 | length 48.4
  Bottom Layer w0.8: IC13.14 54.679,33.782 55.041,33.42 55.099,33.42 56.642,31.877 62.727,31.877 62.738,31.866 69.255,31.866 72.949,35.56 93.853,35.56 95.631,33.782 IC14.14
pads on no net: DS1.5 DS2.5 DS3.5 DS4.5 DS5.5 DS6.5 IC7.4 IC7.13 IC8.4 IC8.13 IC9.4 IC9.13 IC10.4 IC10.13 IC11.4 IC11.13 IC12.4 IC12.13 IC13.11 IC13.12 IC13.13

## Keep-outs
Keep-Out Layer:
  the board outline again, w0.254

## Other copper
Top Layer:
  pour cut-out: 139.361,90.861 139.361,99.361 0.639,99.361 1.079,98.921 123.425,98.921 125.464,96.882 125.464,94.586 125.926,94.124 130.865,94.124 130.867,94.126 130.898,94.095 135.999,94.095 139.216,90.878
  text "Phut" at 92.329,76.708 h1.52
  text "Giay" at 136.652,76.454 h1.52
  text "Gio" at 46.355,76.327 h1.52
  text "Chinh Phut" at 118.999,4.191 h1.52
  text "Reset" at 28.194,4.064 h1.52
  text "Chinh Gio" at 76.454,2.794 h1.52